# Altium PCB MainBoard.PcbDoc
Units mm, origin at the board's own origin, x right, y up, seen from the top; angles counter-clockwise.
Board outline 46.1 x 60 mm, 2 copper layers (Top Layer, Bottom Layer); 21 components, 20 nets, 102 pads, 20 vias.
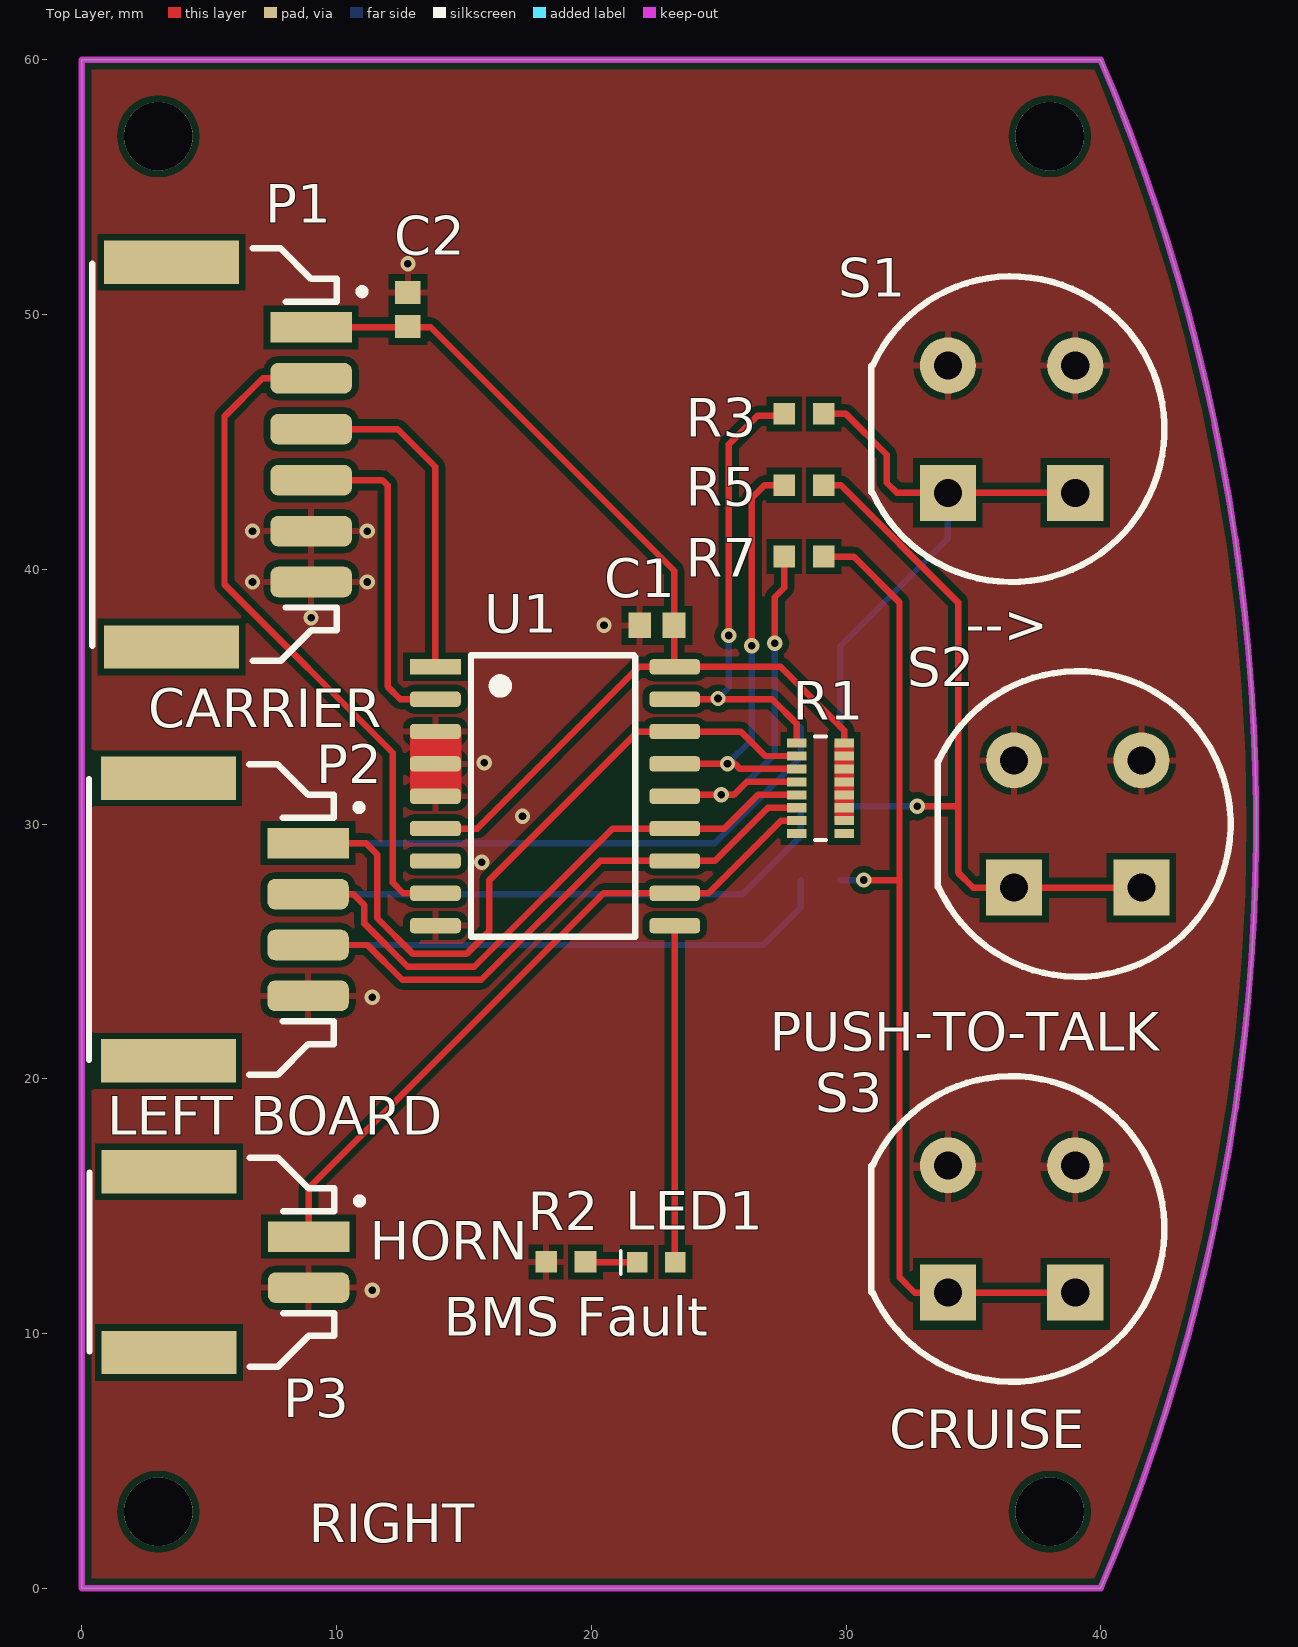
[diagram p0: Top Layer view]
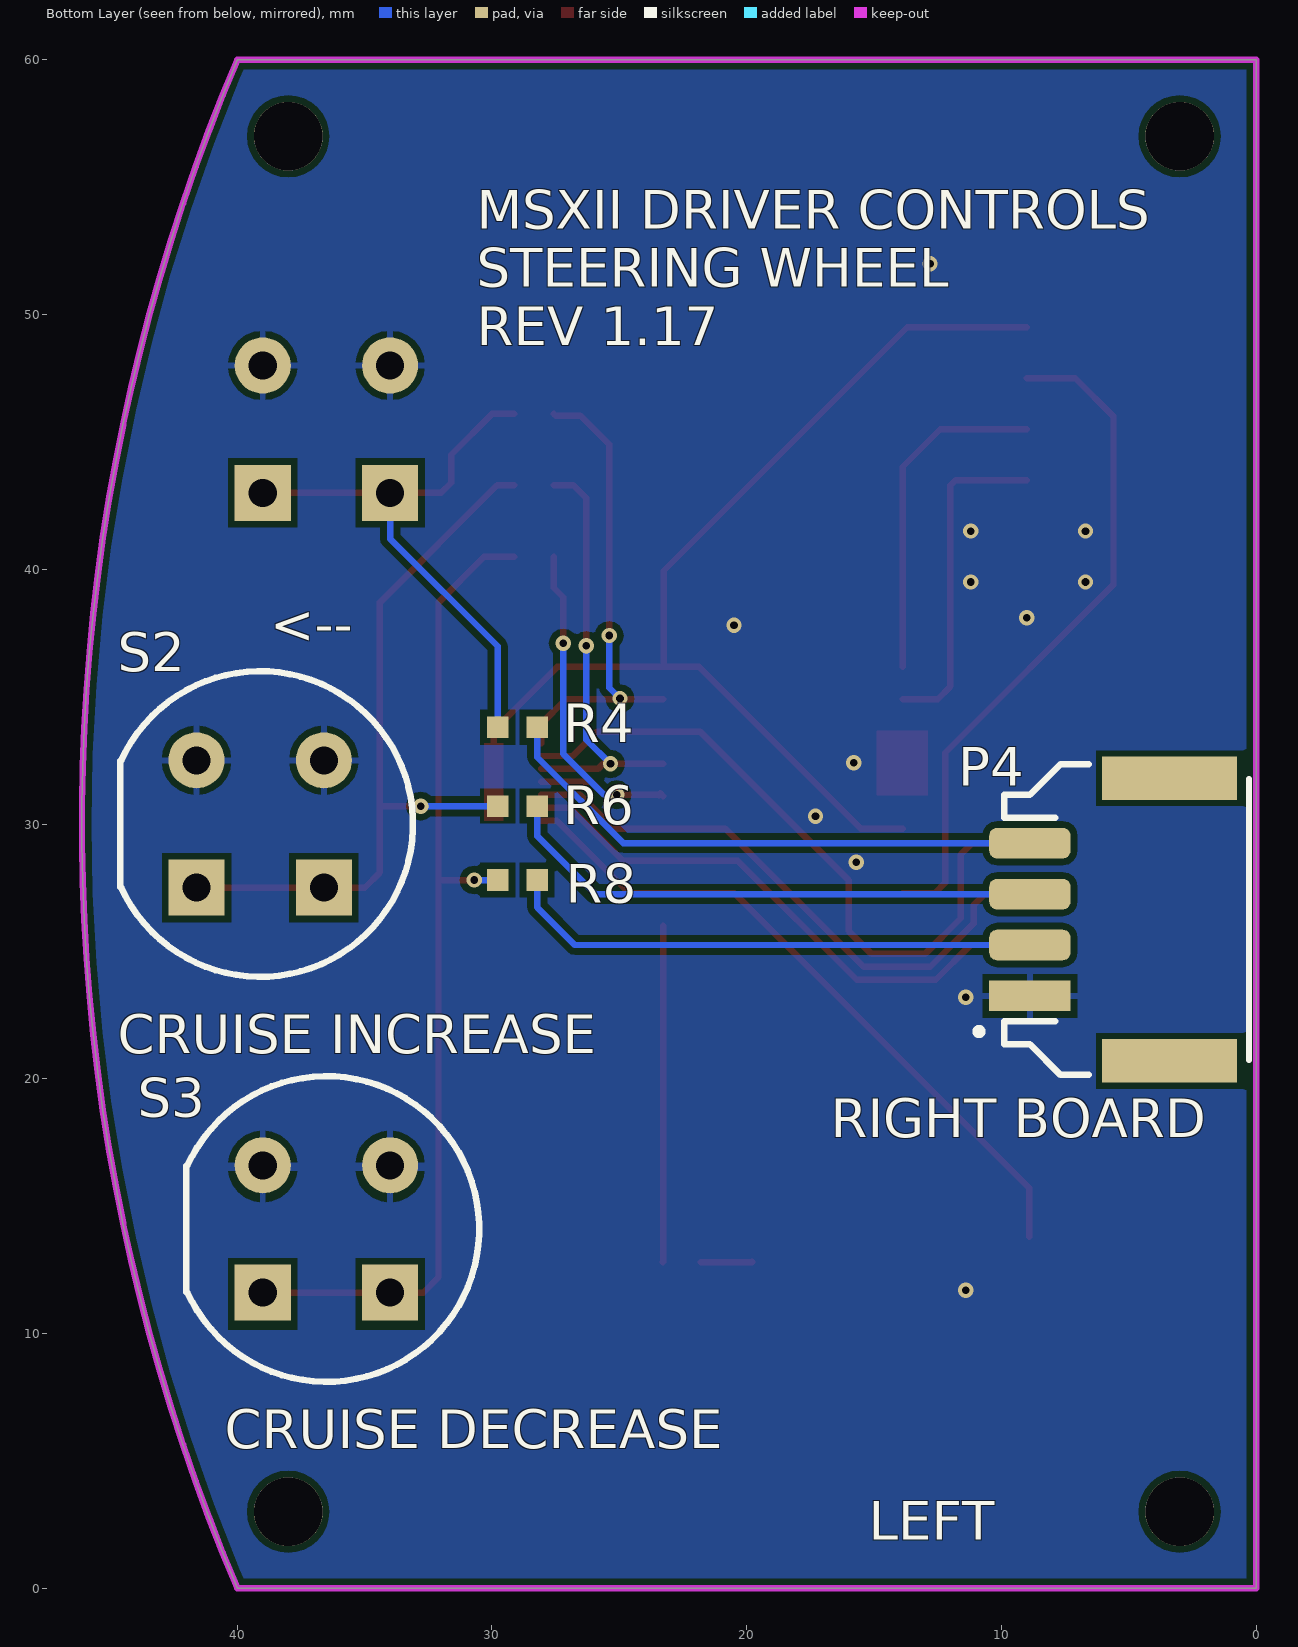
[diagram p1: Bottom Layer view, seen from below]
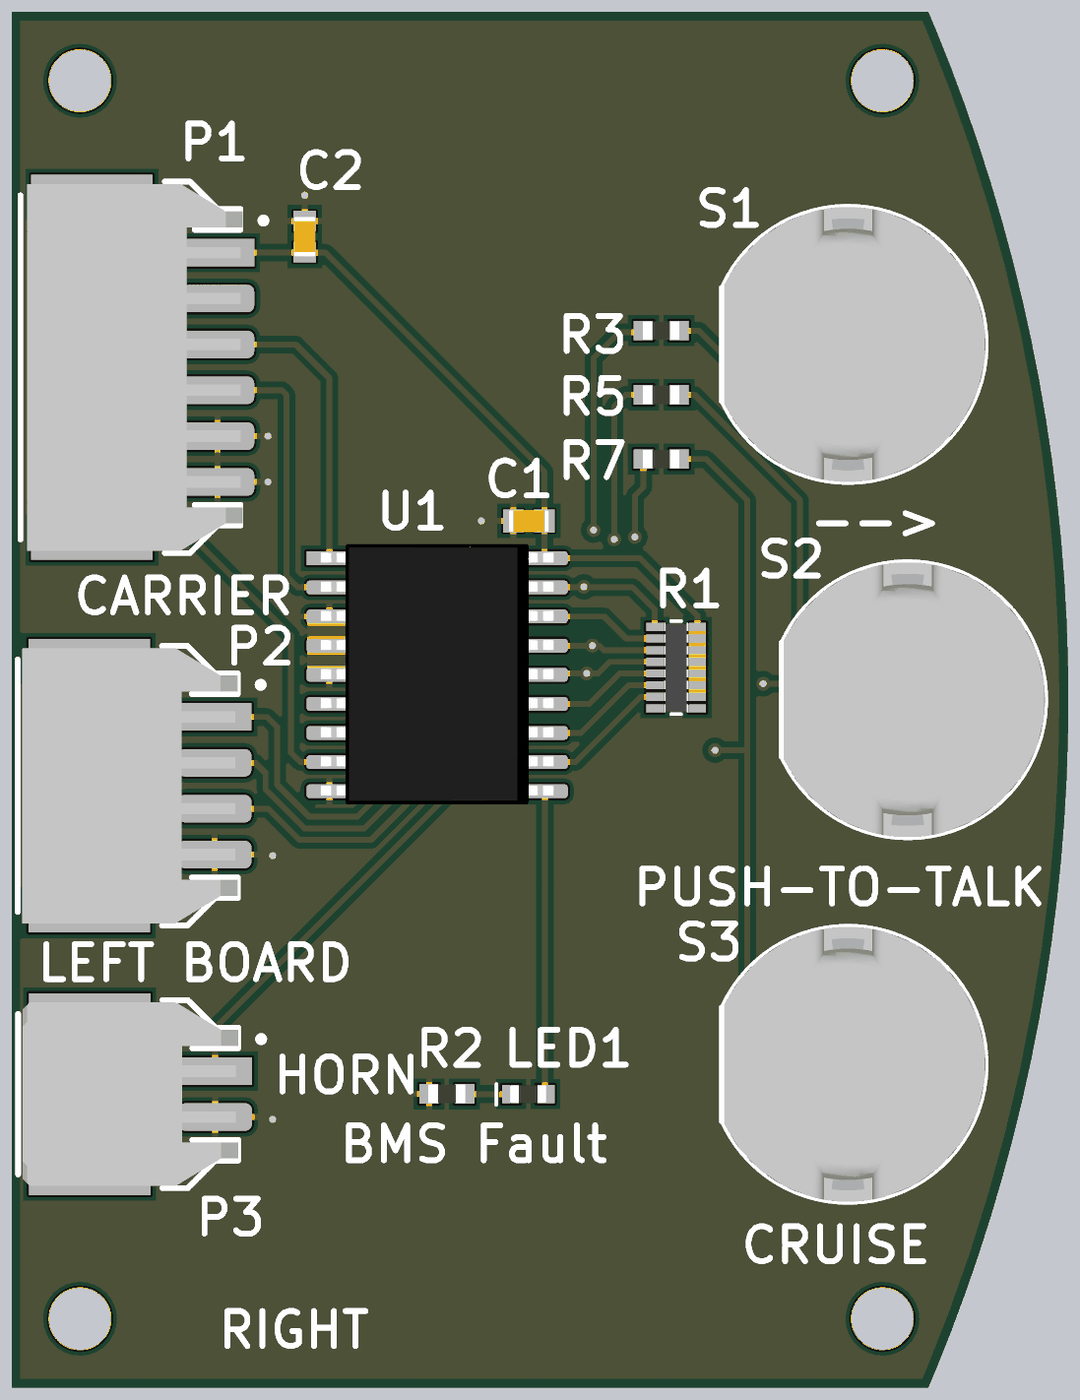
[diagram p2: 3D render of the assembled board from above, using the file's embedded part models]
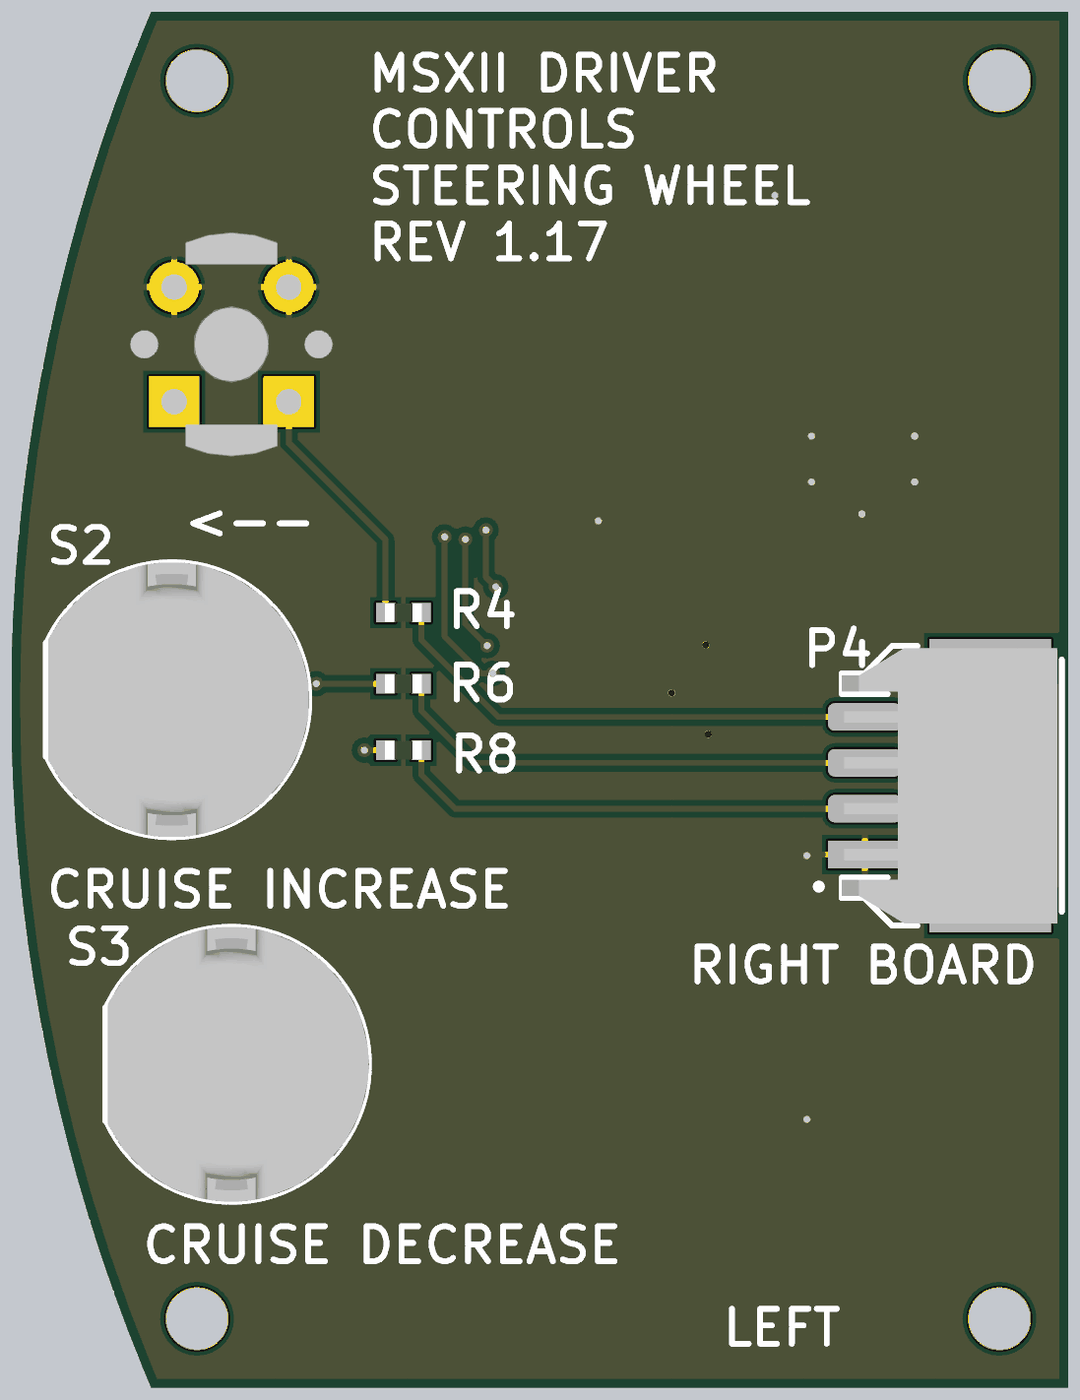
[diagram p3: 3D render of the assembled board from below, using the file's embedded part models]

## Layer stack, top to bottom
Top Solder: solder mask 0.0102, Solder Resist, Dk 3.5
Top Layer: signal copper 0.0356
Dielectric 1: dielectric 0.32, FR-4, Dk 4.8
Bottom Layer: signal copper 0.0356
Bottom Solder: solder mask 0.0102, Solder Resist, Dk 3.5

## Board outline
40,60 0,60 0,0 40,0 ccw(c-30.654,30)

## Design rules (kind name [scope] priority, off if disabled: settings)
Clearance [All] p1: gap=0.254 ignorepadtopadclearanceinfootprint=FALSE except(0: Arc-Hole Track-Hole SMDPad-Hole THPad-Hole Via-Hole Fill-Hole Poly-Hole Region-Hole Text-Hole; 0.152: Arc-SMDPad Track-SMDPad SMDPad-SMDPad)
PolygonConnect [All] p1: thpad.connectstyle=Relief thpad.reliefconductorwidth=0.254 thpad.reliefentries=4 thpad.polygonreliefangle="90 Angle" thpad.airgapwidth=0.254 smdpad.connectstyle=Relief smdpad.reliefconductorwidth=0.254 smdpad.reliefentries=4 smdpad.polygonreliefangle="90 Angle" smdpad.airgapwidth=0.254 via.connectstyle=Direct via.reliefconductorwidth=0.254 via.reliefentries=4 via.polygonreliefangle="90 Angle" via.airgapwidth=0.254
RoutingVias [All] p1: holewidth=0.711 width=1.27 viastyle="Through Hole" minholewidth=0.711 minwidth=1.27 maxholewidth=0.711 maxwidth=1.27
SolderMaskExpansion [All] p1: expansion=0.102
Width [All] p1: maxlimit=0.254 minlimit=0.254 preferedwidth=0.254
30 further rules are at their usual default settings.

## Classes and differential pairs
component class MSXII_SteeringWheelBoard: C1 C2 LED1 P1 P2 P3 P4 R1 R2 R3 R4 R5 R6 R7 R8 S1 S2 S3 U1

## Components (designator, comment, footprint, x,y, rotation, side; value= is the part's Value field where it differs from the comment)
C1 "CAP CER 0.1UF 50V 10% X7R 0603" "CAP, 0603" 22.577,37.8 r180 top
C2 "CAP CER 1UF 50V 10% X7R 0603" "CAP, 0603" 12.8,50.2 r90 top
LED1 "LED RED CLEAR 2V 0603" LED_0603 23.25,12.81 r180 top
P1 "DURA-CLIK" "CONN, 6POS Dura-Click" 9,49.5 r270 top
P2 "DURA-CLIK" "CONN, 4POS Dura-Click" 8.88,29.25 r270 top
P3 "CONN 2POS DURA-CLIK 0.079\"" "CONN, 2POS Dura-Click" 8.9,13.8 r270 top
P4 "Dura-Clik" "CONN, 4POS Dura-Click" 8.88,23.25 r90 bottom
R1 "RES ARRAY 10K OHM 5% 8RES" "RES ARRAY, 8 POS 1506" 29,31.4 r0 top value=Value
R2 "RES 510 OHM 5% 1/10W 0603" "RES, 0603" 19,12.81 r180 top
R3 "RES 0.0 OHM 1/4W 0603" "RES, 0603" 28.35,46.1 r0 top
R4 "RES 0.0 OHM 1/4W 0603" "RES, 0603" 29,33.8 r0 bottom
R5 "RES 0.0 OHM 1/4W 0603" "RES, 0603" 28.35,43.3 r0 top
R6 "RES 0.0 OHM 1/4W 0603" "RES, 0603" 29,30.7 r0 bottom
R7 "RES 0.0 OHM 1/4W 0603" "RES, 0603" 28.35,40.5 r0 top
R8 "RES 0.0 OHM 1/4W 0603" "RES, 0603" 29,27.8 r0 bottom
S1 "SPST" "SW SPST D6 SERIES GREEN" 34,43 r0 top
S2 "SPST" "SW SPST D6 SERIES WHITE" 36.6,27.5 r0 top
S2 "SPST" "SW SPST D6 SERIES YELLOW" 41.6,27.5 r180 bottom
S3 "SPST" "SW SPST D6 SERIES BLUE" 34,11.6 r0 top
S3 "SPST" "SW SPST D6 SERIES YELLOW" 39,11.6 r180 bottom
U1 "MCP23008" "IC 18SOIC" 13.877,36.17 r270 top

## Footprints (in the part's own frame and the unit in brackets; to place one, negate y for a bottom-side part, rotate by r counter-clockwise, add the part's x,y. Pads: shape width x height; smd on the part's side, far side on the other; paste and mask are expansions set on the pad)
"CAP, 0603" [mm] "Chip Capacitor, 2-Leads, Body 1.60x0.81mm, IPC Medium Density"
  rect 0.9x1 smd mask+0.076: 1(-0.675,0) 2(0.675,0)
  body extent -0.87,-0.48 0.87,0.48, height 0.9
"CONN, 2POS Dura-Click" [mm] "WM7169CT-ND"
  rect 1.2x3.2 smd: 1(0,0)
  rrect50% 1.2x3.2 smd: 2(2,0)
  rect 1.7x5.3 smd: ""(-2.55,-5.48) ""(4.55,-5.48)
  silkscreen extent -3.1,-8.6 5.1,2.13, body extent -3,-8.4 5,1, height 6.39
"CONN, 4POS Dura-Click" [mm]
  rect 1.2x3.2 smd: 1(0,0)
  rrect50% 1.2x3.2 smd: 2(2,0) 3(4,0) 4(6,0)
  rect 1.7x5.3 smd: ""(-2.55,-5.48) ""(8.55,-5.48)
  silkscreen extent -3.1,-8.6 9.1,2.13, body extent -3,-8.4 9,1, height 6.36
"CONN, 6POS Dura-Click" [mm]
  rect 1.2x3.2 smd: 1(0,0)
  rrect50% 1.2x3.2 smd: 2(2,0) 3(4,0) 4(6,0) 5(8,0) 6(10,0)
  rect 1.7x5.3 smd: ""(-2.55,-5.48) ""(12.55,-5.48)
  silkscreen extent -3.1,-8.6 13.1,2.13, body extent -3,-8.3 13,1.1, height 6.36
"IC 18SOIC" [mm]
  rect 0.6x2 smd: 1(0,0)
  rrect50% 0.6x2 smd: 2(1.27,0) 3(2.54,0) 4(3.81,0) 5(5.08,0) 6(6.35,0) 7(7.62,0) 8(8.89,0) 9(10.16,0) 10(10.16,9.4) 11(8.89,9.4) 12(7.62,9.4) 13(6.35,9.4) 14(5.08,9.4) 15(3.81,9.4) 16(2.54,9.4) 17(1.27,9.4) 18(0,9.4)
  silkscreen extent -0.45,1.4 10.6,7.85, body extent -0.62,-0.38 10.72,9.78, height 2
LED_0603 [mm]
  rect 0.8x0.8 smd: 1(-0.05,0.01) 2(1.45,0.01)
  silkscreen extent 2.09,-0.43 2.09,0.48, body extent -0.1,-0.39 1.5,0.41, height 0.55
"RES ARRAY, 8 POS 1506" [mil]
  rect 30x14 smd: 1(-36.5,70) 2(-36.5,50) 3(-36.5,30) 4(-36.5,10) 5(-36.5,-10) 6(-36.5,-30) 7(-36.5,-50) 8(-36.5,-70) 9(36.5,-70) 10(36.5,-50) 11(36.5,-30) 12(36.5,-10) 13(36.5,10) 14(36.5,30) 15(36.5,50) 16(36.5,70)
  silkscreen extent -9,-80 9,80, body extent -21,-77 21,77, height 18
"RES, 0603" [mm] "Chip Resistor, 2-Leads, Body 1.60x0.80mm, IPC Medium Density"
  rect 0.85x0.85 smd: 1(-0.775,0) 2(0.775,0)
  body extent -0.8,-0.4 0.8,0.4, height 0.55
"SW SPST D6 SERIES BLUE" [mm]
  rect 2.2x2.2 hole 1.1: 1(0,0) 1(5,0)
  round 2.2 hole 1.1: 2(0,5) 2(5,5)
  silkscreen extent -3,-3.5 8.5,8.5, body extent -2.9,-3.5 8.5,8.5, height 6.17
"SW SPST D6 SERIES GREEN" [mm]
  rect 2.2x2.2 hole 1.1: 1(0,0) 1(5,0)
  round 2.2 hole 1.1: 2(0,5) 2(5,5)
  silkscreen extent -3,-3.5 8.5,8.5, body extent -2.9,-3.5 8.5,8.5, height 6.17
"SW SPST D6 SERIES WHITE" [mm]
  rect 2.2x2.2 hole 1.1: 1(0,0) 1(5,0)
  round 2.2 hole 1.1: 2(0,5) 2(5,5)
  silkscreen extent -3,-3.5 8.5,8.5, body extent -2.9,-3.5 8.5,8.5, height 6.17
"SW SPST D6 SERIES YELLOW" [mm]
  rect 2.2x2.2 hole 1.1: 1(0,0) 1(5,0)
  round 2.2 hole 1.1: 2(0,5) 2(5,5)
  silkscreen extent -3,-3.5 8.5,8.5, body extent -2.9,-3.5 8.5,8.5, height 6.17

## Part data
C1: "0.10µF ±10% 50V Ceramic Capacitor X7R 0603 (1608 Metric)", Capacitance=0.1µF, Manufacturer 1="AVX Corporation", Manufacturer Part Number 1=06035C104KAT2A, Operating Temperature="-55°C ~ 125°C", Package / Case="0603 (1608 Metric)", Ratings=-, Supplier Part Number 1=478-5052-1-ND, Temperature Coefficient=X7R, Tolerance=±10%, Voltage=50V, ComponentLink1Description=http://datasheets.avx.com/X7RDielectric.pdf, ComponentLink1URL=http://datasheets.avx.com/X7RDielectric.pdf, Height - Seated (Max)=-, Lead Spacing=-, Lead Style=-, Mounting Type="Surface Mount, MLCC", Packaging="Cut Tape (CT)", Part Status=Active, Size / Dimension="0.063\" L x 0.032\" W (1.60mm x 0.81mm)", Supplier 1=Digi-Key, Thickness (Max)="0.035\" (0.90mm)"
C2: "1µF ±10% 50V Ceramic Capacitor X7R 0603 (1608 Metric)", Capacitance=1µF, Manufacturer 1="Taiyo Yuden", Manufacturer Part Number 1=UMK107AB7105KA-T, Operating Temperature="-55°C ~ 125°C", Package / Case="0603 (1608 Metric)", Ratings=-, Supplier Part Number 1=587-3247-1-ND, Temperature Coefficient=X7R, Tolerance=±10%, Voltage=50V, ComponentLink1Description=http://www.yuden.co.jp/productdata/catalog/en/mlcc_all_e.pdf, ComponentLink1URL=http://www.yuden.co.jp/productdata/catalog/en/mlcc_all_e.pdf, Height - Seated (Max)=-, Lead Spacing=-, Lead Style=-, Mounting Type="Surface Mount, MLCC", Packaging="Cut Tape (CT)", Part Status=Active, Size / Dimension="0.063\" L x 0.031\" W (1.60mm x 0.80mm)", Supplier 1=Digi-Key, Thickness (Max)="0.037\" (0.95mm)"
LED1: "Red 631nm LED Indication - Discrete 2V 0603 (1608 Metric)", Color=Red, Current - Test=20mA, Lens Color=Colorless, Manufacturer="Wurth Electronics Inc.", Manufacturer Part Number=150060RS75000, Millicandela Rating=250mcd, Package / Case="0603 (1608 Metric)", Supplier Device Package=0603, Supplier Part Number 1=732-4978-1-ND, Voltage - Forward (Vf) (Typ)=2V, Category=Optoelectronics, ComponentLink1Description=http://katalog.we-online.de/led/datasheet/150060RS75000.pdf, ComponentLink1URL=http://katalog.we-online.de/led/datasheet/150060RS75000.pdf, Features=-, Height (Max)=0.80mm, Lens Style/Size="Rectangle with Flat Top, 1.10mm x 0.70mm", Lens Transparency=Clear, Mounting Type="Surface Mount", Packaging="Cut Tape (CT)", Part Status=Active, Pricing 1="1=0.21, 100=0.1617, 500=0.13964 (CAD)", RoHS="RoHS Compliant", Size / Dimension="1.60mm L x 0.80mm W", Stock 1=35521, Supplier 1=Digi-Key, Viewing Angle=140°, Wavelength - Dominant=625nm, Wavelength - Peak=630nm
P1: library part "CONN 6POS DURA-CLIK 0.079\" RGT", "6 Positions Header, Shrouded Connector 0.079\" (2.00mm) Surface Mount, Right Angle Tin", Current Rating=-, Insulation Color=Natural, Manufacturer="Molex, LLC", Manufacturer Part Number=5023520600, Material Flammability Rating="UL94 V-0", Supplier Part Number 1=WM7173CT-ND, Applications="Automotive, Industrial", Category="Connectors, Interconnects", ComponentLink1Description=http://www.molex.com/pdm_docs/sd/5023520200_sd.pdf, ComponentLink1URL=http://www.molex.com/pdm_docs/sd/5023520200_sd.pdf, Connector Type=Header, Contact Finish - Mating=Tin, Contact Finish - Post=Tin, Contact Finish Thickness - Mating=-, Contact Finish Thickness - Post=-, Contact Length - Mating="0.135\" (3.45mm)", Contact Length - Post=-, Contact Material="Copper Alloy", Contact Shape=Square, Contact Type="Male Pin", Fastening Type="Latch Lock", Features="Solder Retention", Ingress Protection=-, Insulation Height="0.252\" (6.40mm)", Insulation Material="Polyamide (PA), Nylon", Mated Stacking Heights=11mm, Mounting Type="Surface Mount, Right Angle", Number of Positions=6, Number of Positions Loaded=All, Number of Rows=1, Operating Temperature=-, Overall Contact Length=-, Packaging="Cut Tape (CT)", Part Status=Active, Pitch - Mating="0.079\" (2.00mm)", Pricing 1="1=2.31, 10=2.091, 25=1.964, 50=1.8784, 100=1.7929, 250=1.6222 (CAD)", RoHS="RoHS Compliant", Row Spacing - Mating=-, Shrouding="Shrouded - 4 Wall", Stock 1=3108, Style="Board to Cable/Wire", Supplier 1=Digi-Key, Termination=Solder, Voltage Rating=-
P2 P4: library part "CONN 4POS DURA-CLIK 0.079\" RGT", "4 Positions Header Connector 0.079\" (2.00mm) Surface Mount, Right Angle Tin", Current Rating=-, Insulation Color=Natural, Manufacturer="Molex, LLC", Manufacturer Part Number=5023520400, Material Flammability Rating="UL94 V-0", Supplier Part Number 1=WM7171CT-ND, Applications="Automotive, Industrial", Category="Connectors, Interconnects", ComponentLink1Description=http://www.molex.com/pdm_docs/sd/5023520200_sd.pdf, ComponentLink1URL=http://www.molex.com/pdm_docs/sd/5023520200_sd.pdf, Connector Type=Header, Contact Finish - Mating=Tin, Contact Finish - Post=Tin, Contact Finish Thickness - Mating=-, Contact Finish Thickness - Post=-, Contact Length - Mating="0.135\" (3.45mm)", Contact Length - Post=-, Contact Material="Copper Alloy", Contact Shape=Square, Contact Type="Male Pin", Fastening Type="Latch Lock", Features="Solder Retention", Ingress Protection=-, Insulation Height="0.252\" (6.40mm)", Insulation Material="Polyamide (PA), Nylon", Mated Stacking Heights=11mm, Mounting Type="Surface Mount, Right Angle", Number of Positions=4, Number of Positions Loaded=All, Number of Rows=1, Operating Temperature=-, Overall Contact Length=-, Packaging="Cut Tape (CT)", Part Status=Active, Pitch - Mating="0.079\" (2.00mm)", Pricing 1="1=2.07, 10=1.823, 25=1.7164, 50=1.6446, 100=1.5731, 250=1.43016 (CAD)", RoHS="RoHS Compliant", Row Spacing - Mating=-, Shrouding="Shrouded - 4 Wall", Stock 1=10075, Style="Board to Cable/Wire", Supplier 1=Digi-Key, Termination=Solder, Voltage Rating=-
P3: "2 Positions Header, Shrouded Connector 0.079\" (2.00mm) Surface Mount, Right Angle Tin", Current Rating=-, Insulation Color=Natural, Manufacturer 1="Molex, LLC", Manufacturer Part Number 1=5023520200, Material Flammability Rating="UL94 V-0", Supplier Part Number 1=WM7169CT-ND, ComponentLink1Description=http://www.molex.com/pdm_docs/sd/5023520200_sd.pdf, ComponentLink1URL=http://www.molex.com/pdm_docs/sd/5023520200_sd.pdf, Connector Type=Header, Contact Finish - Mating=Tin, Contact Finish - Post=Tin, Contact Finish Thickness - Mating=-, Contact Finish Thickness - Post=-, Contact Length - Mating="0.135\" (3.45mm)", Contact Length - Post=-, Contact Material="Copper Alloy", Contact Shape=Square, Contact Type="Male Pin", Fastening Type="Latch Lock", Ingress Protection=-, Insulation Height="0.252\" (6.40mm)", Insulation Material="Polyamide (PA), Nylon", Mated Stacking Heights=11mm, Mounting Type="Surface Mount, Right Angle", Number of Positions=2, Number of Positions Loaded=All, Number of Rows=1, Operating Temperature=-, Overall Contact Length=-, Packaging="Cut Tape (CT)", Part Status=Active, Pitch - Mating="0.079\" (2.00mm)", Row Spacing - Mating=-, Series=DuraClik, Shrouding="Shrouded - 4 Wall", Style="Board to Cable/Wire", Supplier 1=Digi-Key, Termination=Solder, Voltage=-
R1: library part "RES ARRAY 10K OHM 5% 8RES EXB-2HV103JV", "RES ARRAY SMD 10K 5% 62.5mW 1506", Manufacturer="Panasonic Electronic Components", Manufacturer_Part_Number=EXB-2HV103JV, Operating Temperature="-55°C ~ 125°C", Package / Case="1506, Convex, Long Side Terminals", Power Per Element=62.5mW, Resistance (Ohms)=10k, Supplier Device Package=1506, Supplier Part Number 1=Y1103CT-ND, Temperature Coefficient=±200ppm/°C, Tolerance=±5%, Applications="Automotive AEC-Q200", C="Copyright (C) 2015 Accelerated Designs. All rights reserved", Category=Resistors, Circuit Type=Isolated, ComponentLink1Description=https://industrial.panasonic.com/cdbs/www-data/pdf/AOC0000/AOC0000C14.pdf, ComponentLink1URL=https://industrial.panasonic.com/cdbs/www-data/pdf/AOC0000/AOC0000C14.pdf, Copyright="Copyright (C) 2015 Accelerated Designs. All rights reserved", Height - Seated (Max)="0.022\" (0.55mm)", Manufacturer Part Number=EXB-2HV103JV, Mounting Type="Surface Mount", Packaging="Cut Tape (CT)", Part Status=Active, Pricing 1="1=0.43, 10=0.373, 25=0.2712, 50=0.1964, 100=0.1456, 250=0.11176, 500=0.08806, 1000=0.06096 (CAD)", RoHS="RoHS Compliant", Size / Dimension="0.150\" L x 0.063\" W (3.80mm x 1.60mm)", Stock 1=152779, Supplier 1=Digi-Key, Vendor=Panasonic
R2: "RES SMD 510 OHM 5% 1/10W 0603", Manufacturer 1=Yageo, Manufacturer Part Number 1=RC0603JR-07510RL, Operating Temperature="-55°C ~ 155°C", Package / Case="0603 (1608 Metric)", Power=1/10W, Resistance=510, Supplier Device Package=0603, Supplier Part Number 1=311-510GRCT-ND, Temperature Coefficient=±100ppm/°C, Tolerance=±5%, ComponentLink1Description=http://www.yageo.com/documents/recent/PYu-RC_Group_51_RoHS_L_7.pdf, ComponentLink1URL=http://www.yageo.com/documents/recent/PYu-RC_Group_51_RoHS_L_7.pdf, Composition="Thick Film", Failure Rate=-, Height - Seated (Max)="0.022\" (0.55mm)", Packaging="Cut Tape (CT)", Part Status=Active, Size / Dimension="0.063\" L x 0.031\" W (1.60mm x 0.80mm)", Supplier 1=Digi-Key
R3 R4 R5 R6 R7 R8: "RES SMD 0.0 OHM JUMPER 1/4W 0603", Manufacturer 1="Vishay Dale", Manufacturer Part Number 1=CRCW06030000Z0EAHP, Operating Temperature="-55°C ~ 155°C", Package / Case="0603 (1608 Metric)", Power (Watts)=1/4W, Resistance=0.0, Supplier Device Package=0603, Supplier Part Number 1=541-0.0SBCT-ND, ComponentLink1Description=http://www.vishay.com/docs/20043/crcwhpe3.pdf, ComponentLink1URL=http://www.vishay.com/docs/20043/crcwhpe3.pdf, Composition="Thick Film", Failure Rate=-, Height - Seated (Max)="0.022\" (0.55mm)", Packaging="Cut Tape (CT)", Part Status=Active, Size / Dimension="0.063\" L x 0.033\" W (1.60mm x 0.85mm)", Supplier 1=Digi-Key
S1: library part "SW SPST-NO 0.1A 32V D6 Series Green", "Pushbutton Switch SPST-NO Keyswitch Through Hole D6 Series Green", Color - Actuator/Cap=Green, Current Rating="100mA (DC)", Illumination Type, Color=-, Manufacturer=C&K, Manufacturer Part Number="D6R50 F1 LFS", Operating Temperature="-20°C ~ 85°C", Supplier Part Number 1=401-1976-ND, Voltage Rating - DC=32V, Actuator Type="Round, Button", Category=Switches, Circuit=SPST-NO, ComponentLink1Description=http://www.ckswitches.com/media/1341/d6.pdf, ComponentLink1URL=http://www.ckswitches.com/media/1341/d6.pdf, Electrical Life="250,000 Cycles", Features="Tactile Feedback", Illumination Voltage (Nominal)=-, Ingress Protection=-, Mechanical Life=-, Mounting Type="Through Hole", Packaging=Bulk, Panel Cutout Dimensions=-, Part Status=Active, Pricing 1="1=1.73, 10=1.607, 25=1.5308, 50=1.454, 100=1.4158, 250=1.37756, 500=1.30102, 1000=1.22448, 5000=1.03316 (CAD)", RoHS="RoHS Compliant", Stock 1=3742, Supplier 1=Digi-Key, Switch Function=Off-Mom, Termination Style="PC Pin", Type=Keyswitch, Voltage Rating - AC=-
S2: library part "SW SPST-NO 0.1A 32V D6 Series White", "Pushbutton Switch SPST-NO Keyswitch Through Hole D6 Series White", Color - Actuator/Cap=White, Current Rating="100mA (DC)", Illumination Type, Color=-, Manufacturer=C&K, Manufacturer Part Number="D6R00 F2 LFS", Operating Temperature="-20°C ~ 85°C", Supplier Part Number 1=401-1989-ND, Voltage Rating - DC=32V, Actuator Type="Round, Button", Category=Switches, Circuit=SPST-NO, ComponentLink1Description=http://www.ckswitches.com/media/1341/d6.pdf, ComponentLink1URL=http://www.ckswitches.com/media/1341/d6.pdf, Electrical Life="250,000 Cycles", Features="Tactile Feedback", Illumination Voltage (Nominal)=-, Ingress Protection=-, Mechanical Life=-, Mounting Type="Through Hole", Packaging=Bulk, Panel Cutout Dimensions=-, Part Status=Active, Pricing 1="1=1.64, 10=1.532, 25=1.4584, 50=1.3856, 100=1.3492, 250=1.31272, 500=1.2398, 1000=1.16686, 5000=0.98454 (CAD)", Pricing 2="1=1.73, 10=1.607, 25=1.5308, 50=1.454, 100=1.4158, 250=1.37756, 500=1.30102, 1000=1.22448, 5000=1.03316 (CAD)", RoHS="RoHS Compliant", Stock 1=6244, Stock 2=3742, Supplier 1=Digi-Key, Supplier 2=Digi-Key, Supplier Part Number 2=401-1976-ND, Switch Function=Off-Mom, Termination Style="PC Pin", Type=Keyswitch, Voltage Rating - AC=-
S2 S3: library part "SW SPST-NO 0.1A 32V D6 Series Yellow", "Pushbutton Switch SPST-NO Keyswitch Through Hole D6 Series Yellow", Color - Actuator/Cap=Yellow, Current Rating="100mA (DC)", Illumination Type, Color=-, Manufacturer=C&K, Manufacturer Part Number="D6R30 F1 LFS", Operating Temperature="-20°C ~ 85°C", Supplier Part Number 1=401-1974-ND, Voltage Rating - DC=32V, Actuator Type="Round, Button", Category=Switches, Circuit=SPST-NO, ComponentLink1Description=http://www.ckswitches.com/media/1341/d6.pdf, ComponentLink1URL=http://www.ckswitches.com/media/1341/d6.pdf, Electrical Life="250,000 Cycles", Features="Tactile Feedback", Illumination Voltage (Nominal)=-, Ingress Protection=-, Mechanical Life=-, Mounting Type="Through Hole", Packaging=Bulk, Panel Cutout Dimensions=-, Part Status=Active, Pricing 1="1=1.73, 10=1.607, 25=1.5308, 50=1.454, 100=1.4158, 250=1.37756, 500=1.30102, 1000=1.22448, 5000=1.03316 (CAD)", RoHS="RoHS Compliant", Stock 1=2814, Supplier 1=Digi-Key, Switch Function=Off-Mom, Termination Style="PC Pin", Type=Keyswitch, Voltage Rating - AC=-
S3: library part "SW SPST-NO 0.1A 32V D6 Series Blue", "Pushbutton Switch SPST-NO Keyswitch Through Hole D6 Series Blue", Color - Actuator/Cap=Blue, Current Rating="100mA (DC)", Illumination Type, Color=-, Manufacturer=C&K, Manufacturer Part Number="D6R60 F1 LFS", Operating Temperature="-20°C ~ 85°C", Supplier Part Number 1=401-1977-ND, Voltage Rating - DC=32V, Actuator Type="Round, Button", Category=Switches, Circuit=SPST-NO, ComponentLink1Description=http://www.ckswitches.com/media/1341/d6.pdf, ComponentLink1URL=http://www.ckswitches.com/media/1341/d6.pdf, Electrical Life="250,000 Cycles", Features="Tactile Feedback", Illumination Voltage (Nominal)=-, Ingress Protection=-, Mechanical Life=-, Mounting Type="Through Hole", Packaging=Bulk, Panel Cutout Dimensions=-, Part Status=Active, Pricing 1="1=1.73, 10=1.607, 25=1.5308, 50=1.454, 100=1.4158, 250=1.37756, 500=1.30102, 1000=1.22448, 5000=1.03316 (CAD)", RoHS="RoHS Compliant", Stock 1=3385, Supplier 1=Digi-Key, Switch Function=Off-Mom, Termination Style="PC Pin", Type=Keyswitch, Voltage Rating - AC=-
U1: library part "IC I/O EXPANDER I2C 8B 18SOIC", "MCP23008 I/O Expander 8B+1Int 18P SOIC", Current - Output Source/Sink=25mA, Manufacturer="Microchip Technology", Manufacturer Part Number=MCP23008T-E/SO, Operating Temperature="-40°C ~ 125°C", Package / Case="18-SOIC (0.295\", 7.50mm Width)", Supplier Device Package=18-SOIC, Supplier Part Number 1=MCP23008T-E/SOCT-ND, Voltage - Supply="1.8 V ~ 5.5 V", Category="Integrated Circuits (ICs)", ComponentLink1Description=http://www.microchip.com/mymicrochip/filehandler.aspx?ddocname=en021920, ComponentLink1URL=http://www.microchip.com/mymicrochip/filehandler.aspx?ddocname=en021920, Features=POR, Interface=I²C, Interrupt Output=Yes, Mounting Type="Surface Mount", Number of I/O=8, Output Type=Push-Pull, Packaging="Cut Tape (CT)", Part Status=Active, Pricing 1="1=1.62, 25=1.3548, 100=1.2431 (CAD)", RoHS="RoHS Compliant", Stock 1=5607, Supplier 1=Digi-Key

## Free pads (board coordinates)
  round 2.7 hole 2.7: ""(3,3) ""(3,57) ""(38,3) ""(38,57)

## Via types
v1: diameter 0.6, hole 0.3, Top Layer to Bottom Layer, tented both sides, 20 vias

## Nets (pads, with @x,y where several pads share a name; then routed paths per layer and width w, separated by ;. In a path a pad name is that pad's centre, name@x,y a point inside that pad or via, vN(x,y) a via of type N, cw(c..) or ccw(c..) an arc to the next point about the centre after c; other vN are vias at no path point)
+3V3: C1.1 C2.1 P1.1 R1.10 R1.11 R1.12 R1.13 R1.14 R1.15 R1.16 U1.6 U1.18 | length 42.2
  Top Layer w0.254: P1.1 13.7,49.5 23.252,39.948 C1.1 23.252,36.195 U1.18 ; U1.6 15.52,29.82 21.87,36.17 U1.18 ; R1.16 29.927,33.673 27.43,36.17 U1.18
BMS_FAULT_SIGNAL: LED1.1 U1.10 | length 13.2
  Top Layer w0.254: U1.10 23.277,12.823 LED1.1
CRUISE_CONTROL_SPEED_DECREASE: P2.3 R1.6 U1.12 | length 22.6
  Top Layer w0.254: P2.3 11.213,25.25 12.579,23.884 15.684,23.884 20.35,28.55 U1.12 24.85,28.55 26.938,30.638 R1.6
CRUISE_CONTROL_SPEED_DECREASE_1: P4.2 R8.1 | length 21
  Bottom Layer w0.254: P4.2 26.75,25.25 28.225,26.725 R8.1
CRUISE_CONTROL_SPEED_INCREASE: P2.2 R1.5 U1.13 | length 23.6
  Top Layer w0.254: P2.2 10.65,27.25 11.092,26.808 11.092,26.09 12.79,24.392 15.41,24.392 20.838,29.82 U1.13 25.22,29.82 26.546,31.146 R1.5
CRUISE_CONTROL_SPEED_INCREASE_1: P4.3 R6.1 | length 21.5
  Bottom Layer w0.254: P4.3 25.95,27.25 28.225,29.525 R6.1
CRUISE_CONTROL_TOGGLE: R1.4 R7.1 U1.14 | length 15.8
  Top Layer w0.254: U1.14 23.387,31.2 23.462,31.125 23.487,31.15 v1(25.1,31.15) 25.6,31.15 26.104,31.654 R1.4 ; v1(27.2,37.1) 27.2,38.9 27.575,39.275 R7.1
  Bottom Layer w0.254: v1(25.1,31.15) 25.6,31.15 27.2,32.75 v1(27.2,37.1)
GND: C1.2 C2.2 P1.5 P1.6 P2.4 P3.2 P4.1 R2.2 S1.2 S2.2 S3.2 U1.3 U1.4 U1.5 U1.9
  other v1: 11.4,11.7 11.4,23.2 15.7,28.5 17.3,30.3 15.8,32.4 20.5,37.8 9,38.1 6.7,39.5 11.2,39.5 6.7,41.5 11.2,41.5 12.8,52
GPIO_INTERRUPT: P1.2 U1.8 | length 26.9
  Top Layer w0.254: P1.2 7.1,47.5 5.6,46 5.6,39.4 12.2,32.8 12.2,27.7 12.62,27.28 U1.8
GPIO_SCL: P1.3 U1.1 | length 13.3
  Top Layer w0.254: P1.3 12.4,45.5 13.877,44.023 U1.1
GPIO_SDA: P1.4 U1.2 | length 13.1
  Top Layer w0.254: P1.4 11.8,43.5 12,43.3 12,35.4 12.5,34.9 U1.2
HORN: P3.1 R1.7 U1.11 | length 27.1
  Top Layer w0.254: P3.1 8.9,15.7 20.48,27.28 U1.11 24.598,27.28 27.448,30.13 R1.7
LEFT_TURN_SIGNAL: P2.1 R1.2 U1.16 | length 27.6
  Top Layer w0.254: P2.1 11.15,29.25 11.6,28.8 11.6,26.3 13,24.9 15.1,24.9 16,25.8 16,27.8 21.83,33.63 U1.16 25.87,33.63 26.83,32.67 R1.2
LEFT_TURN_SIGNAL_1: P4.4 R4.1 | length 21.9
  Bottom Layer w0.254: P4.4 24.85,29.25 28.225,32.625 R4.1
NetLED1_2: LED1.2 R2.1 | length 2
  Top Layer w0.254: R2.1 19.785,12.8 LED1.2
NetR3_2: R3.2 R4.2 S1.1 | length 22.8
  Top Layer w0.254: R3.2 30,46.1 31.6,44.5 31.6,43.4 32,43 34,43 S1.1@39,43
  Bottom Layer w0.254: R4.2 29.775,36.975 34,41.2 S1.1@34,43
NetR5_2: R5.2 R6.2 S2.1 | length 29.9
  Top Layer w0.254: R5.2 29.8,43.3 34.4,38.7 34.4,30.7 ; v1(32.8,30.7) 34.4,30.7 ; S2.1@41.6,27.5 36.6,27.5 35,27.5 34.4,28.1 34.4,30.7
  Bottom Layer w0.254: R6.2 v1(32.8,30.7)
NetR7_2: R7.2 R8.2 S3.1 | length 39.7
  Top Layer w0.254: R7.2 30.3,40.5 32.1,38.7 32.1,27.8 ; v1(30.7,27.8) 32.1,27.8 ; S3.1@39,11.6 34,11.6 32.7,11.6 32.1,12.2 32.1,27.8
  Bottom Layer w0.254: R8.2 v1(30.7,27.8)
PUSH_TO_TALK_INPUT: R1.3 R5.1 U1.15 | length 17.2
  Top Layer w0.254: U1.15 v1(25.35,32.36) 25.64,32.36 25.838,32.162 R1.3 ; v1(26.3,37) 26.3,42.8 26.8,43.3 R5.1
  Bottom Layer w0.254: v1(25.35,32.36) 26.3,33.31 v1(26.3,37)
RIGHT_TURN_SIGNAL: R1.1 R3.1 U1.17 | length 18.8
  Top Layer w0.254: U1.17 27.1,34.9 28.073,33.927 R1.1 ; v1(25.4,37.4) 25.4,44.9 26.525,46.025 27.5,46.025 R3.1
  Bottom Layer w0.254: v1(24.975,34.925) 25.4,35.35 v1(25.4,37.4)
pads on no net: P1. P2. P3. P4. R1.8 R1.9 U1.7

## Polygon pours and split planes (outlines as drawn)
GND on Bottom Layer "Bottom Layer-GND" (solid, remove dead copper, pour order 2): 0,0 40,0 ccw(c-30.936,30) 40,60 0,60
GND on Top Layer "Top Layer-GND" (solid, remove dead copper, pour order 0): 0,60 0,0 40,0 ccw(c-32.038,30) 40,60

## Keep-outs
Keep-Out Layer:
  the board outline again, w0.254

## Other copper
Top Layer:
  region net +3V3: 29.55,33.178 29.55,30.13 30.3,30.13 30.3,33.178
  region net GND: 12.9,33.663 14.9,33.663 14.9,31.138 12.9,31.138

## Silkscreen, mask and mechanical layers (free items; w line width, h text height)
Top Overlay:
  text "-->" at 34.7,37.1 h1.52
  text "CARRIER" at 2.6,33.8 h1.52
  text "PUSH-TO-TALK" at 27,21.1 h1.52
  text "LEFT BOARD" at 1,17.8 h1.52
  text "HORN" at 11.3,12.9 h1.52
  text "BMS Fault" at 14.2,9.9 h1.52
  text "CRUISE" at 31.7,5.5 h1.52
  text "RIGHT" at 8.9,1.8 h1.52
Bottom Overlay:
  text "MSXII DRIVER CONTROLS / STEERING WHEEL / REV 1.17" at 30.6,48.8 h1.52
  text "<--" at 38.7,37.1 h1.52
  text "CRUISE INCREASE" at 44.7,21 h1.52
  text "RIGHT BOARD" at 16.7,17.7 h1.52
  text "CRUISE DECREASE" at 40.5,5.5 h1.52
  text "LEFT" at 15.2,1.9 h1.52